# EAGLE board Lora Rain gauge (EAGLE 9.6.2)

Size 160 x 100 mm. Coordinates in mm from the lower left corner, seen from the top.
Outline: 0,0 160,0 160,100 0,100 0,0
Copper layers (1*16): Top 0.035mm / dielectric 1.5mm / Bottom 0.035mm
Design rules "default": minimum track width 6mil, minimum drill 0.35mm, track to track 6mil, track to pad 6mil, pad to pad 6mil, via to via 6mil, smd to smd 6mil, copper to edge 40mil, drill to drill 6mil, minimum pad ring 10mil, minimum via ring 8mil, stop-mask expansion 4mil, vias tented up to drill 0mil, thermal gap 10mil

## Footprints (pad centres in the part's own frame; a part is rotated, then mirrored left to right if it is on the bottom)
BPW34 = drill 0.8: P$1 0,2.55; P$2 0,-2.55
AB9V = drill 1.118 pad 3.15 octagon: + 0,2.54; - 0,-2.54
1X03-CLEANBIG = drill 1.016 pad 1.676: 1 -2.54,0; 2 0,0; 3 2.54,0
BOARD_ARDUINO_MKR_WAN_1310 = drill 1: J3_1 -10.16,11.715; J3_2 -10.16,9.175; J3_3 -10.16,6.635; J3_4 -10.16,4.095; J3_5 -10.16,1.555; J3_6 -10.16,-0.985; J3_7 -10.16,-3.525; J3_8 -10.16,-6.065; J3_9 -10.16,-8.605; J3_10 -10.16,-11.145; J3_11 -10.16,-13.685; J3_12 -10.16,-16.225; J3_13 -10.16,-18.765; J3_14 -10.16,-21.305; J5_1 10.16,-21.305; J5_2 10.16,-18.765; J5_3 10.16,-16.225; J5_4 10.16,-13.685; J5_5 10.16,-11.145; J5_6 10.16,-8.605; J5_7 10.16,-6.065; J5_8 10.16,-3.525; J5_9 10.16,-0.985; J5_10 10.16,1.555; J5_11 10.16,4.095; J5_12 10.16,6.635; J5_13 10.16,9.175; J5_14 10.16,11.715 | hole 2.2: 10.25,-25.4; -10.25,-25.4; -10.25,31.6; 10.25,31.6
RTC_EEPROM_BATTERY = drill 1 square: J1.1 -12.065,-5.08; J2.1 12.065,-6.35 | drill 1: J1.2 -12.065,-2.54; J1.3 -12.065,0; J1.4 -12.065,2.54; J1.5 -12.065,5.08; J2.2 12.065,-3.81; J2.3 12.065,-1.27; J2.4 12.065,1.27; J2.5 12.065,3.81; J2.6 12.065,6.35; J2.7 12.065,8.89 | hole 3.2: -11,-11.176; 11,-11.176
CARD-SD-ADAPTER = drill 1 square: 1 -21.59,8.89 | drill 1: 2 -19.05,8.89; 3 -21.59,6.35; 4 -19.05,6.35; 5 -21.59,3.81; 6 -19.05,3.81; 7 -21.59,1.27; 8 -19.05,1.27; 9 -21.59,-1.27; 10 -19.05,-1.27; 11 -21.59,-3.81; 12 -19.05,-3.81; 13 -21.59,-6.35; 14 -19.05,-6.35; 15 -21.59,-8.89; 16 -19.05,-8.89 | hole 2.5: -20.32,12.5; -20.32,-12.5
BATTERY-CHARGER-LI-5V = drill 1.2 pad 3 square: BAT+ 10.795,8.255; BAT- 10.795,-7.62; IN+ -10.795,8.255; IN- -10.795,-7.62

## Placement (x,y rotation side)
D1  BPW34  [BPW34]  121.92,41.91 0 top
LIPO  AB9V  [AB9V]  104.14,41.91 0 top
REED_SWITCH  [1X03-CLEANBIG]  102.87,24.13 0 top
U1  ARDUINO_MKR_WAN_1310  [BOARD_ARDUINO_MKR_WAN_1310]  69.85,54.61 0 top
U$1  RTC-EEPROM-BATTERY  [RTC_EEPROM_BATTERY]  31.75,44.45 0 top
U$2  CARD-SD-ADAPTER  [CARD-SD-ADAPTER]  118.11,72.39 0 top
U$3  BATTERY-CHARGER-LI-5V  [BATTERY-CHARGER-LI-5V]  31.75,77.47 0 top

## Library data of the parts
D1 = SparkFun-Sensors; SF_ID: PRT-09541
LIPO = battery
REED_SWITCH = adafruit
U1 = ARDUINO_MKR_WAN_1310; AVAILABILITY: Not in stock; CHECK_PRICES: https://www.snapeda.com/parts/ARDUINO%20MKR%20WAN%201310/Arduino/view-part/?ref=eda; DESCRIPTION: Arduino Pro; LoRa; SAM D21; 5VDC; Flash: 256kB; SRAM: 32kB; MF: Arduino; MP: ARDUINO MKR WAN 1310; PACKAGE: None; PRICE: None; SNAPEDA_LINK: https://www.snapeda.com/parts/ARDUINO%20MKR%20WAN%201310/Arduino/view-part/?ref=snap
U$1-U$3 = diy-modules

## Nets
3V3: U$2.3
+5V: U1.J5_14
BAT+: LIPO.+ U$3.BAT+
BAT-: LIPO.- U$3.BAT-
CS: U1.J5_2 U$2.7
GND: REED_SWITCH.2 U1.J5_11 U$1.J1.1 U$2.1
GND.2: U$1.J2.2 U$2.15
MISO: U1.J5_5 U$2.13
MOSI: U1.J5_3 U$2.9
N$1: D1.P$1
N$2: D1.P$2
SCK: U1.J5_4 U$2.11
SCL: U1.J5_7 U$1.J1.4
SDA: U1.J5_6 U$1.J1.3
SW1: REED_SWITCH.3 U1.J3_13
VCC: REED_SWITCH.1 U1.J5_12 U$1.J1.2 U$2.5
VCC.2: U$1.J2.3
VIN: U1.J5_13